# Altium PCB Combination.PcbDoc
Units mil, origin at the board's own origin, x right, y up, seen from the top; angles counter-clockwise.
Board outline 3935 x 3935 mil, 2 copper layers (Top Layer, Bottom Layer); 54 components, 0 nets, 242 pads, 32 vias.
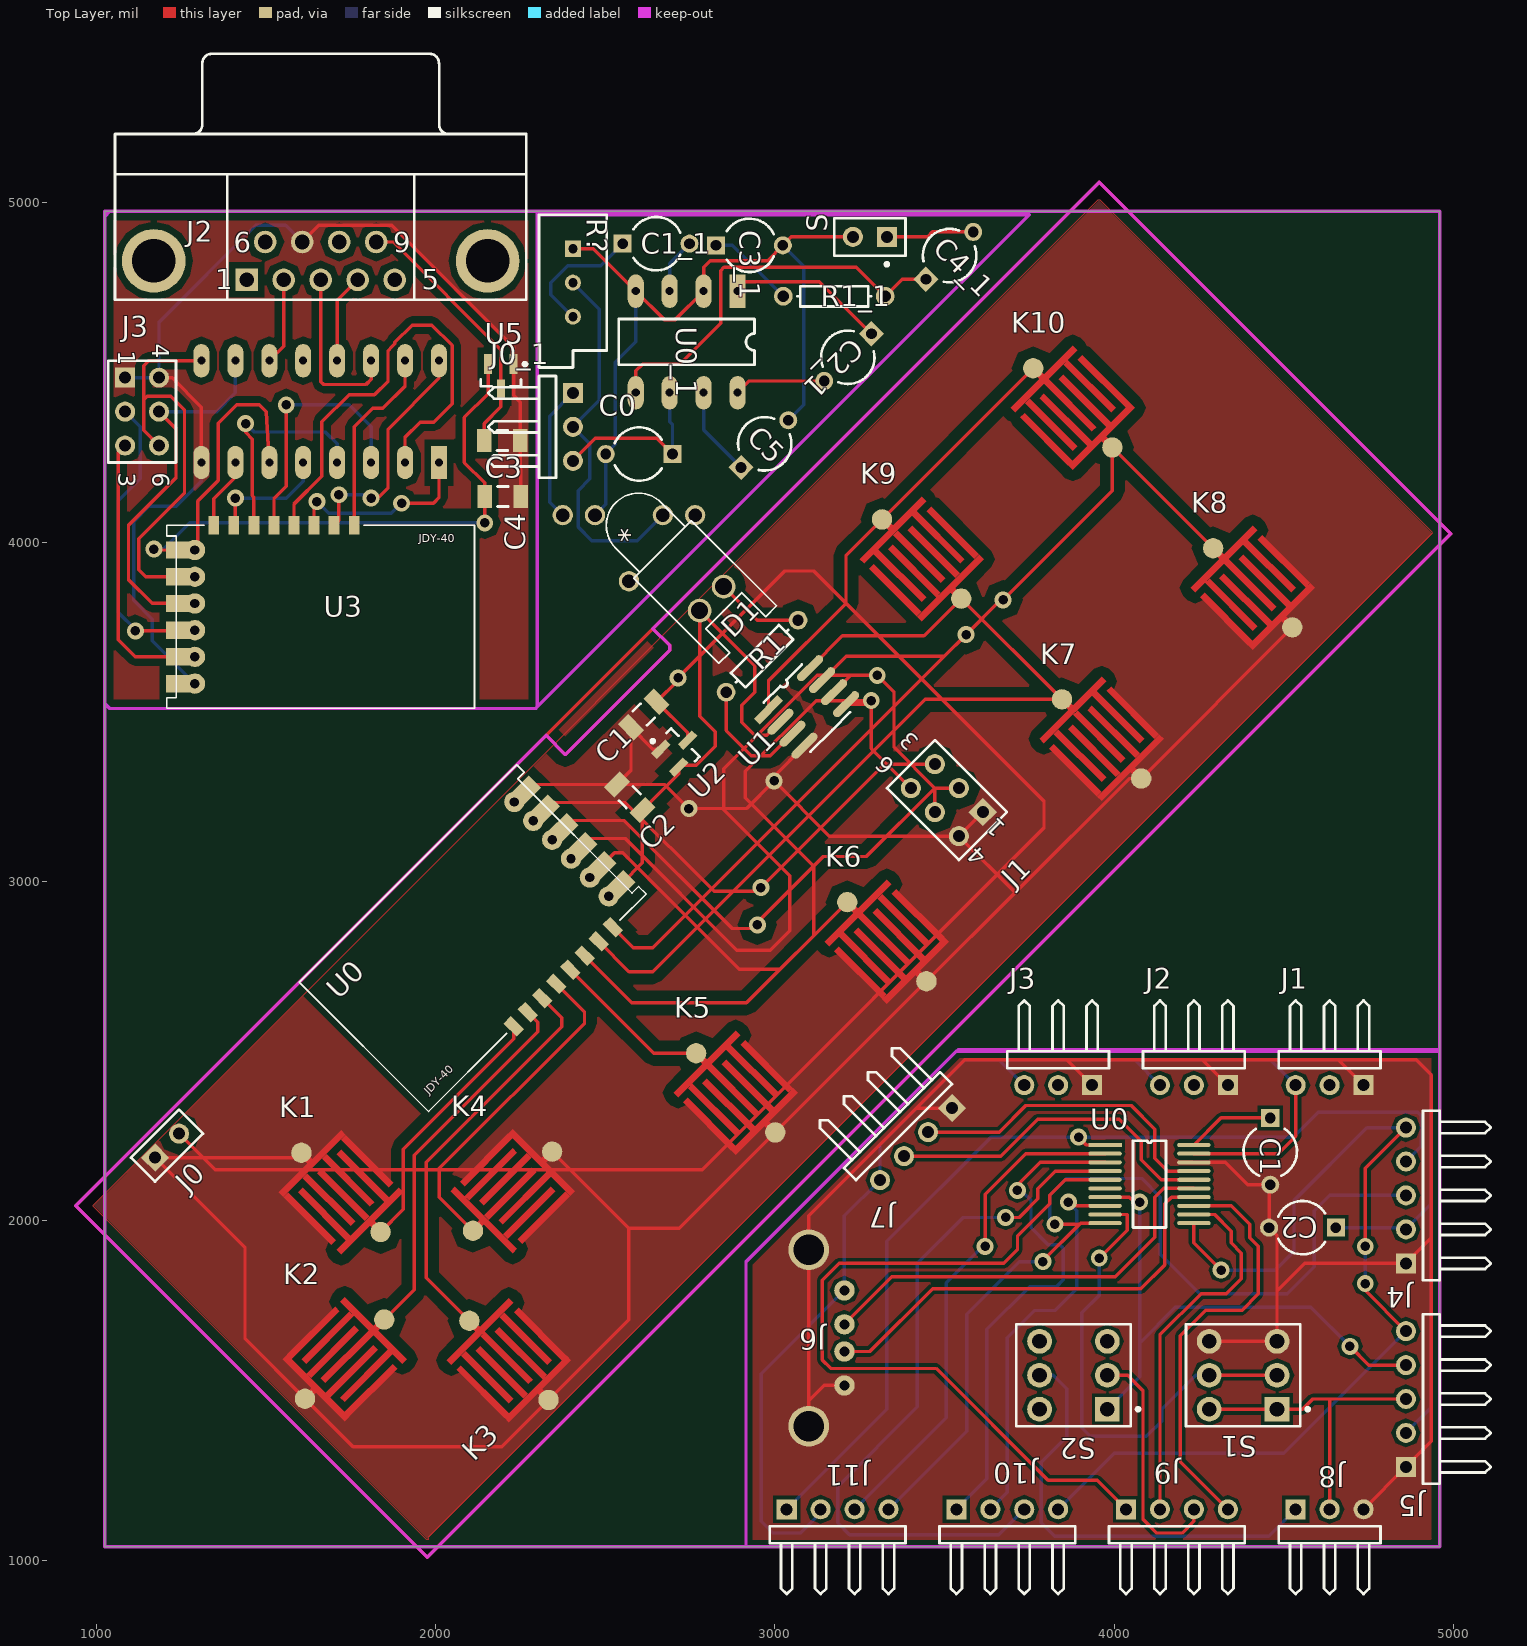
[diagram p0: Top Layer view]
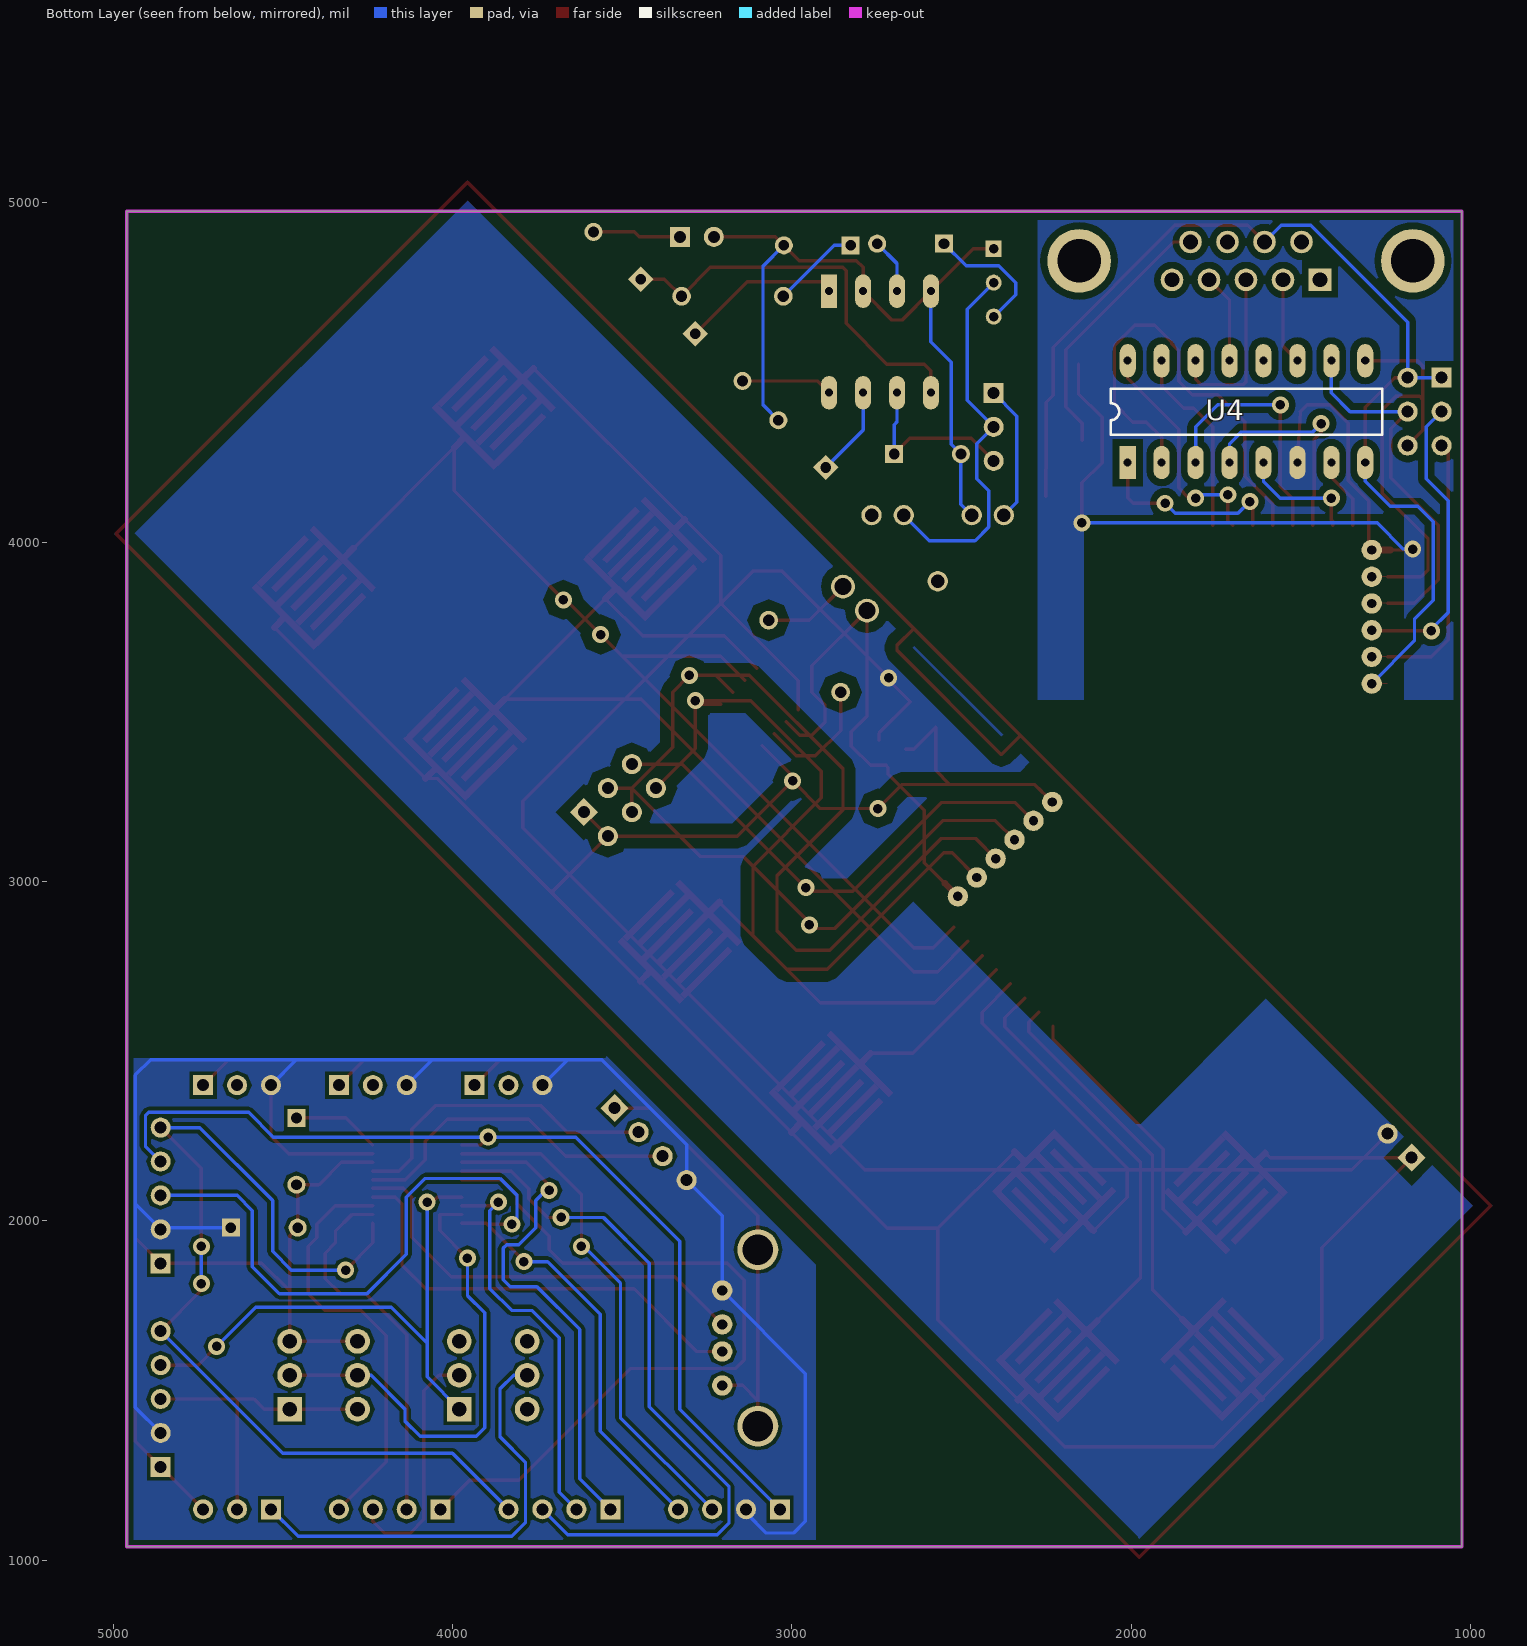
[diagram p1: Bottom Layer view, seen from below]

## Layer stack, top to bottom
Top Solder: solder mask 0.4, Solder Resist, Dk 3.5
Top Layer: signal copper 1.4
Dielectric 1: dielectric 12.6, FR-4, Dk 4.8
Bottom Layer: signal copper 1.4
Bottom Solder: solder mask 0.4, Solder Resist, Dk 3.5

## Board outline
1025,1040 1025,4975 4960,4975 4960,1040

## Design rules (kind name [scope] priority, off if disabled: settings)
Clearance [All] p1: gap=10 ignorepadtopadclearanceinfootprint=FALSE except(0: Arc-Hole Track-Hole SMDPad-Hole THPad-Hole Via-Hole Fill-Hole Poly-Hole Region-Hole Text-Hole)
PolygonConnect [All] p1: connectstyle=Relief reliefconductorwidth=10 reliefentries=4 polygonreliefangle="90 Angle" airgapwidth=10
RoutingVias [All] p1: holewidth=28 width=50 viastyle="Through Hole" minholewidth=28 minwidth=50 maxholewidth=28 maxwidth=50
SolderMaskExpansion [All] p1: expansion=4
Width [All] p1: maxlimit=10 minlimit=10 preferedwidth=10
30 further rules are at their usual default settings.

## Components (designator, comment, footprint, x,y, rotation, side; value= is the part's Value field where it differs from the comment)
* "AudioJack" AudioJack_3.5mm 2570,3885 r90 top
C0 "Cap2" CAPR5-4X5 2600,4260 r180 top value=100uF
C1 "Cap2" CAPR5-4X5 4460,2205 r270 top value=4.7uF
C1 "Cap Semi" C1206 2613.62,3492.34 r45 top value=1uF
C1_1 "Cap2" CAPR5-4X5 2650,4880 r0 top value=1uF (schematic designator C1)
C2 "Cap2" CAPR5-4X5 4555,1980 r180 top value=0.47uF
C2 "Cap Semi" C1206 2572.11,3248.39 r315 top value=1uF
C2_1 "Cap2" CAPR5-4X5 3215,4545 r225 top value=10uF (schematic designator C2)
C3 "Cap Semi" C1206 2196.85,4300 r180 top value=1uF
C3_1 "Cap2" CAPR5-4X5 2925,4875 r0 top value=47uF (schematic designator C3)
C4 "Cap Semi" C1206 2198.15,4135 r180 top value=1uF
C4_1 "Cap2" CAPR5-4X5 3515,4845 r45 top value=220uF (schematic designator C4)
C5 "Cap2" CAPR5-4X5 2970,4290 r45 top value=100uF
D1 "RED LED" LED-0 2813.83,3833.98 r225 top
J0 "POWER" HDR1X2 1173.35,2186.42 r45 top
J0_1 "Header 3H" HDR1X3H 2405,4440 r270 top (schematic designator J0)
J1 "POWER" HDR1X3H 4735,2400 r180 top
J1 "UART" HDR2X3_CEN 3612.86,3204.66 r135 top
J2 "VIDEO" HDR1X3H 4335,2400 r180 top
J2 "DB9" DSUB1.385-2H9 1661.42,5203.11 r0 top
J3 "AUDIO" HDR1X3H 3935,2400 r180 top
J3 "UART" HDR2X3_CEN 1085,4485 r270 top
J4 "Joystick2" HDR1X5H 4860,1875 r90 top
J5 "Joystick1" HDR1X5H 4860,1275 r90 top
J6 "USB_TypeA_Female" USB_TypeA_Female 3205,1795 r270 top
J7 "I2C" HDR1X4H 3522.13,2332.13 r225 top
J8 "EXP" HDR1X3H 4535,1150 r0 top
J9 "EXP" HDR1X4H 4035,1150 r0 top
J10 "EXP" HDR1X4H 3535,1150 r0 top
J11 "EXP" HDR1X4H 3035,1150 r0 top
K1 "UP" GoldFinger 1707.21,1942.47 r45 top
K2 "LEFT" GoldFinger 1873.38,1578.31 r135 top
K3 "DOWN" GoldFinger 2230.47,1730.34 r225 top
K4 "RIGHT" GoldFinger 2085.51,2101.57 r315 top
K5 "SELECT" GoldFinger 2898.69,2518.76 r225 top
K6 "START" GoldFinger 3344.16,2964.24 r225 top
K7 "B" GoldFinger 3977.02,3561.74 r225 top
K8 "A" GoldFinger 4422.5,4007.22 r225 top
K9 "TURBO B" GoldFinger 3446.69,4092.07 r225 top
K10 "TURBO A" GoldFinger 3892.17,4537.55 r225 top
R1 "680" AXIAL-0.3 2962.33,3664.27 r45 top
R1_1 "Res1" AXIAL-0.3 3175,4725 r0 top value=10 (schematic designator R1)
R? "RP" VR5 2405,4765 r270 top value=10K
S "Speaker" PIN2 3330,4900 r180 top
S1 "Download" DPDT-6 4380,1545 r180 top
S2 "Standard/1PExt" DPDT-6 3880,1545 r180 top
U0 "CH559" SSOP20 3973.19,2223.54 r0 top
U0 "JDY-40" JDY-401#1 2230.36,2573.02 r135 top
U0_1 "LM386" DIP8 2890,4740 r270 top (schematic designator U0)
U1 "STC15W204S-SOP8" SOP8 2981.26,3506.43 r45 top
U2 "XC6206" SOT23-3N 2716.68,3390.34 r45 top
U3 "JDY-40" JDY-401#2 1760,4050 r270 top
U4 "STC15W204S-DIP16" DIP16 2010,4235 r90 bottom
U5 "XC6206" SOT23-3N 2192.6,4487.6 r270 top

## Footprints (in the part's own frame and the unit in brackets; to place one, negate y for a bottom-side part, rotate by r counter-clockwise, add the part's x,y. Pads: shape width x height; smd on the part's side, far side on the other; paste and mask are expansions set on the pad)
AudioJack_3.5mm [mil]
  round 60 hole 40: 1(0,0) 2(195,195) 3(195,100) 4(195,-100) 5(195,-195)
AXIAL-0.3 [mm] "Axial Device, Thru-Hole; 2 Leads; 0.3 in Pin Spacing"
  round 1.4 hole 0.85: 1(-3.81,0) 2(3.81,0)
  silkscreen extent -2.77,-0.76 2.77,0.76
C1206 [mm] "Chip Capacitor, Body 3.2x1.6mm, IPC High Density"
  rect 1.1x1.7 smd: 1(-1.35,0) 2(1.35,0)
  silkscreen extent -0.4,-0.75 0.4,0.75, body extent -1.7,-0.9 1.7,0.9, height 1.3
CAPR5-4X5 [mm] "Capacitor; 2 Leads"
  rect 1.35x1.35 hole 0.8: 1(-2.5,0)
  round 1.35 hole 0.8: 2(2.5,0)
  silkscreen extent -1.69,-2 1.82,2
DIP8 [mm]
  rect 2.5x1.2 hole 0.6: 1(0,0)
  oval 2.5x1.2 hole 0.6: 2(0,-2.54) 3(0,-5.08) 4(0,-7.62) 5(7.6,-7.62) 6(7.6,-5.08) 7(7.6,-2.54) 8(7.6,0)
  silkscreen extent 2.08,-8.89 5.52,1.27, body extent -0.12,-9.14 7.75,1.78, height 5.08
DIP16 [mm]
  rect 2.5x1.2 hole 0.6: 1(0,0)
  oval 2.5x1.2 hole 0.6: 2(0,-2.54) 3(0,-5.08) 4(0,-7.62) 5(0,-10.16) 6(0,-12.7) 7(0,-15.24) 8(0,-17.78) 9(7.62,-17.78) 10(7.62,-15.24) 11(7.62,-12.7) 12(7.62,-10.16) 13(7.62,-7.62) 14(7.62,-5.08) 15(7.62,-2.54) 16(7.62,0)
  silkscreen extent 2.08,-19.05 5.54,1.27
DPDT-6 [mm] "Switch; 6 Leads"
  rect 1.85x1.85 hole 1.1: 1(-2.54,2.54)
  round 1.85 hole 1.1: 2(-2.54,0) 3(-2.54,-2.54) 4(2.54,-2.54) 5(2.54,0) 6(2.54,2.54)
  silkscreen extent -4.96,-3.81 4.28,3.81
DSUB1.385-2H9 [mm] "Connector; D Subminiature; 9 Position; Right Angle; Pitch 1.385 mm"
  rect 1.69x1.69 hole 1.09: 1(-5.54,-10.92)
  round 1.69 hole 1.09: 2(-2.77,-10.92) 3(0,-10.92) 4(2.77,-10.92) 5(5.54,-10.92) 6(-4.155,-8.08) 7(-1.385,-8.08) 8(1.385,-8.08) 9(4.155,-8.08)
  round 4.76 hole 3.26: 10(-12.495,-9.5) 11(12.495,-9.5)
  silkscreen extent -15.4,-12.4 15.4,6
GoldFinger [mil]
  round 60 smd: 1(110,255) 2(110,-75)
  Top Layer region: 220,0 240,0 240,200 220,200
  Top Layer region: 180,-20 200,-20 200,180 180,180
  Top Layer region: -20,-40 240,-40 240,-20 -20,-20
  Top Layer region: -20,200 240,200 240,220 -20,220
  Top Layer region: 140,0 160,0 160,200 140,200
  Top Layer region: 100,-20 120,-20 120,180 100,180
  Top Layer region: 60,0 80,0 80,200 60,200
  Top Layer region: 20,-20 40,-20 40,180 20,180
  Top Layer region: -20,0 0,0 0,200 -20,200
  Top Layer lines w20: 110,255 110,210 ; 110,-30 110,-75
HDR1X2 [mm] "Connector; Header; 2 Position"
  rect 1.5x1.5 hole 0.9: 1(0,0)
  round 1.5 hole 0.9: 2(2.54,0)
  silkscreen extent -1.27,-1.27 3.81,1.27
HDR1X3H [mm] "Connector; Header; 3 Position; Right Angle"
  rect 1.5x1.5 hole 0.9: 1(0,0)
  round 1.5 hole 0.9: 2(2.54,0) 3(5.08,0)
  silkscreen extent -1.27,-6.35 6.35,-1.27
HDR1X4H [mm] "Connector; Header; 4 Position; Right Angle"
  rect 1.5x1.5 hole 0.9: 1(0,0)
  round 1.5 hole 0.9: 2(2.54,0) 3(5.08,0) 4(7.62,0)
  silkscreen extent -1.27,-6.35 8.89,-1.27
HDR1X5H [mm] "Connector; Header; 5 Position; Right Angle"
  rect 1.5x1.5 hole 0.9: 1(0,0)
  round 1.5 hole 0.9: 2(2.54,0) 3(5.08,0) 4(7.62,0) 5(10.16,0)
  silkscreen extent -1.27,-6.35 11.43,-1.27
HDR2X3_CEN [mm] "Connector; Header; 3x2 Position"
  rect 1.5x1.5 hole 0.9: 1(0,0)
  round 1.5 hole 0.9: 2(2.54,0) 3(5.08,0) 4(0,2.54) 5(2.54,2.54) 6(5.08,2.54)
  silkscreen extent -1.27,-1.27 6.35,3.81
JDY-401#1 [mm]
  rect 1.4x0.8 smd: 1(0,0) 2(0,-1.5) 3(0,-3) 4(0,-4.5) 5(0,-6) 6(0,-7.5) 7(0,-9) 8(0,-10.5)
  rect 1.3x2 smd: 9(1.85,-13.092) 10(3.85,-13.092) 11(5.85,-13.092) 12(7.85,-13.092) 13(9.85,-13.092) 14(11.85,-13.092)
  round 1.524 hole 0.7: 9(1.85,-11.918) 10(3.85,-11.918) 11(5.85,-11.918) 12(7.85,-11.918) 13(9.85,-11.918) 14(11.85,-11.918)
  Top Layer lines w0.051: 11.85,-11.918 11.85,-13.092 ; 9.85,-11.918 9.85,-13.092 ; 7.85,-11.918 7.85,-13.092 ; 5.85,-11.918 5.85,-13.092 ; 3.85,-11.918 3.85,-13.092 ; 1.85,-11.918 1.85,-13.092
  Top Layer lines w0.17: 7.636,-11.704 7.85,-11.918
  Top Layer lines w0.5: 1.85,-11.694 1.85,-11.918 1.85,-13.092 1.85,-13.319
  silkscreen extent 0,-14.02 13.7,9.01
JDY-401#2 [mm]
  rect 1.4x0.8 smd: 1(0,0) 2(0,-1.5) 3(0,-3) 4(0,-4.5) 5(0,-6) 6(0,-7.5) 7(0,-9) 8(0,-10.5)
  round 1.524 hole 0.7: 9(1.85,-11.918) 10(3.85,-11.918) 11(5.85,-11.918) 12(7.85,-11.918) 13(9.85,-11.918) 14(11.85,-11.918)
  rect 1.3x2 smd: 9(1.85,-13.092) 10(3.85,-13.092) 11(5.85,-13.092) 12(7.85,-13.092) 13(9.85,-13.092) 14(11.85,-13.092)
  Top Layer lines w0.051: 11.85,-13.092 11.85,-11.918 ; 9.85,-13.092 9.85,-11.918 ; 7.85,-13.092 7.85,-11.918 ; 5.85,-13.092 5.85,-11.918 ; 3.85,-13.092 3.85,-11.918 ; 1.85,-13.092 1.85,-11.918 ; 7.85,-11.918 7.85,-11.918
  Top Layer lines w0.17: 7.85,-11.918 7.636,-11.704
  Top Layer lines w0.5: 1.85,-13.319 1.85,-13.092 1.85,-11.918 1.85,-11.694
  silkscreen extent 0,-14.02 13.7,9.01
LED-0 [mil] "LED; 2 Leads"
  round 70 hole 50: 1(50,0) 2(-50,0)
  silkscreen extent -120,-400 120,150
PIN2 [mm] "Photosensitive Diode; 2 Leads"
  rect 1.5x1.5 hole 0.9: 1(0,0)
  round 1.5 hole 0.9: 2(2.54,0)
  silkscreen extent -1.4,-1.4 3.94,2.17
SOP8 [mm]
  rect 2.5x0.635 smd: 1(0,0)
  oval 2.5x0.635 smd: 2(0,-1.27) 3(0,-2.54) 4(0,-3.81) 5(4.4,-3.81) 6(4.4,-2.54) 7(4.4,-1.27) 8(4.4,0)
  silkscreen extent 0,-4.45 4.19,0.64
SOT23-3N [mm] "SOT23, 3-Leads, Body 2.9x1.3mm, Pitch 0.95mm, Lead Span 2.5mm, IPC Medium Density"
  rect 1.5x0.6 smd: 1(-0.95,0.95) 2(-0.95,-0.95) 3(0.95,0)
  silkscreen extent -1.07,-1.5 0.7,1.92, body extent -0.7,-1.5 0.7,1.5, height 1.1
SSOP20 [mm]
  rect 2.5x0.305 smd: 1(0,0)
  oval 2.5x0.305 smd: 2(0,-0.65) 3(0,-1.3) 4(0,-1.95) 5(0,-2.6) 6(0,-3.25) 7(0,-3.9) 8(0,-4.55) 9(0,-5.2) 10(0,-5.85) 11(6.65,-5.85) 12(6.65,-5.2) 13(6.65,-4.55) 14(6.65,-3.9) 15(6.65,-3.25) 16(6.65,-2.6) 17(6.65,-1.95) 18(6.65,-1.3) 19(6.65,-0.65) 20(6.65,0)
  silkscreen extent 2.09,-6.18 4.57,0.33
USB_TypeA_Female [mil]
  round 60 hole 30: 1(0,0) 2(100,0) 3(180,0) 4(280,0)
  round 120 hole 90: 5(-120,-105) 6(400,-105)
VR5 [mm] "Thru-Hole; 3 Leads"
  rect 1.2x1.2 hole 0.7: 1(-2.54,0)
  round 1.2 hole 0.7: 2(0,0) 3(2.54,0)
  silkscreen extent -5.08,-2.54 6.35,2.54

## Part data
*: library part AudioJack_3.5mm
C0 C1 C1_1 C2 C2_1 C3_1 C4_1 C5: "Capacitor", PackageDescription="Capacitor; 2 Leads", PackageReference=CAPR5-4X5, Published=23-Sep-2002, Publisher="Altium Limited"
C1 C2 C3 C4: "Capacitor (Semiconductor SIM Model)", LatestRevisionDate=29-May-2009, LatestRevisionNote="IPC-7351 Footprint Added.", PackageDescription="Chip Capacitor", PackageReference=C1206, Published=8-Jun-2000, Publisher="Altium Limited"
D1: library part LED0, "Typical INFRARED GaAs LED", LatestRevisionDate=08-Jul-2005, LatestRevisionNote="Mech Layer 1 removed.", PackageDescription="LED; 2 Leads", PackageReference=LED-0, Published=8-Jun-2000, Publisher="Altium Limited"
J0: library part "Header 2", "Header, 2-Pin", LatestRevisionDate=17-Jul-2002, LatestRevisionNote="Re-released for DXP Platform.", Publisher="Altium Limited"
J0_1: "Header, 3-Pin, Right Angle", LatestRevisionDate=17-Jul-2002, LatestRevisionNote="Re-released for DXP Platform.", Publisher="Altium Limited"
J1 J2 J3 J8: library part "Header 3H", "Header, 3-Pin, Right Angle", LatestRevisionDate=17-Jul-2002, LatestRevisionNote="Re-released for DXP Platform.", Publisher="Altium Limited"
J1 J3: library part "Header 3X2A", "Header, 3-Pin, Dual row", LatestRevisionDate=17-Jul-2002, LatestRevisionNote="Re-released for DXP Platform.", Publisher="Altium Limited"
J2: library part "D Connector 9", "Receptacle Assembly, 9 Position, Right Angle", PackageDocument=O, DatasheetDocument=1-Sep-1999, Gender=Receptacle, LatestRevisionDate=17-Jul-2002, LatestRevisionNote="Re-released for DXP Platform.", Orientation="Right Angle", PackageReference=788750, Positions=9, Published=15-Jun-2001, Publisher="Altium Limited"
J4 J5: library part "Header 5H", "Header, 5-Pin, Right Angle", LatestRevisionDate=17-Jul-2002, LatestRevisionNote="Re-released for DXP Platform.", Publisher="Altium Limited"
J7 J9 J10 J11: library part "Header 4H", "Header, 4-Pin, Right Angle", LatestRevisionDate=17-Jul-2002, LatestRevisionNote="Re-released for DXP Platform.", Publisher="Altium Limited"
K1 K2 K3 K4 K5 K6 K7 K8 K9 K10: library part GoldFinger
R1: library part Res1, "Resistor", LatestRevisionDate=17-Jul-2002, LatestRevisionNote="Re-released for DXP Platform.", PackageDescription="Axial Device, Thru-Hole; 2 Leads; 0.3 in Pin Spacing", PackageReference=AXIAL-0.3, Published=8-Jun-2000, Publisher="Altium Limited"
R1_1: "Resistor", LatestRevisionDate=17-Jul-2002, LatestRevisionNote="Re-released for DXP Platform.", PackageDescription="Axial Device, Thru-Hole; 2 Leads; 0.3 in Pin Spacing", PackageReference=AXIAL-0.3, Published=8-Jun-2000, Publisher="Altium Limited"
R?: library part RPot, "Potentiometer", LatestRevisionDate=17-Jul-2002, LatestRevisionNote="Re-released for DXP Platform.", PackageDescription="Variable Resistor, Thru-Hole; 3 Leads", PackageReference=VR5, Published=8-Jun-2000, Publisher="Altium Limited", Set Position=0.5, Sim Note="Enter the Resistance value and the set point into parameter fields."
S: "Loudspeaker", LatestRevisionDate=17-Jul-2002, LatestRevisionNote="Re-released for DXP Platform.", PackageReference=PIN2, Published=24-Mar-1999, Publisher="Altium Limited"
S1 S2: library part SW-DPDT, "Double-Pole, Double-Throw Switch", LatestRevisionDate=17-Jul-2002, LatestRevisionNote="Re-released for DXP Platform.", PackageDescription="Switch; 6 Leads", PackageReference=DPDT-6, Published=24-Mar-1999, Publisher="Altium Limited"

## Via types
v1: diameter 50, hole 28, Top Layer to Bottom Layer, 32 vias

## Nets (pads, with @x,y where several pads share a name; then routed paths per layer and width w, separated by ;. In a path a pad name is that pad's centre, name@x,y a point inside that pad or via, vN(x,y) a via of type N, cw(c..) or ccw(c..) an arc to the next point about the centre after c; other vN are vias at no path point)
pads on no net: *.1 *.2 *.3 *.4 *.5 C0.1 C0.2 C1.1 C1.2 C1_1.1 C1_1.2 C2.1 C2.2 C2_1.1 C2_1.2 C3.1 C3.2 C3_1.1 C3_1.2 C4.1 C4.2 C4_1.1 C4_1.2 C5.1 C5.2 D1.1 D1.2 J0.1 J0.2 J0_1.1 J0_1.2 J0_1.3 J1.1 J1.2 J1.3 J1.4 J1.5 J1.6 J2.1 J2.2 J2.3 J2.4 J2.5 J2.6 J2.7 J2.8 J2.9 J2.10 J2.11 J3.1 J3.2 J3.3 J3.4 J3.5 J3.6 J4.1 J4.2 J4.3 J4.4 J4.5 J5.1 J5.2 J5.3 J5.4 J5.5 J6.1 J6.2 J6.3 J6.4 J6.5 J6.6 J7.1 J7.2 J7.3 J7.4 J8.1 J8.2 J8.3 J9.1 J9.2 J9.3 J9.4 J10.1 J10.2 J10.3 J10.4 J11.1 J11.2 J11.3 J11.4 K1.1 K1.2 K2.1 K2.2 K3.1 K3.2 K4.1 K4.2 K5.1 K5.2 K6.1 K6.2 K7.1 K7.2 K8.1 K8.2 K9.1 K9.2 K10.1 K10.2 R1.1 R1.2 R1_1.1 R1_1.2 R?.1 R?.2 R?.3 S1.1 S1.2 S1.3 S1.4 S1.5 S1.6 S2.1 S2.2 S2.3 S2.4 S2.5 S2.6 S.1 S.2 U0.1 U0.2 U0.3 U0.4 U0.5 U0.6 U0.7 U0.8 U0.9 U0.10 U0.11 U0.12 U0.13 U0.14 U0.15 U0.16 U0.17 U0.18 U0.19 U0.20 U0_1.1 U0_1.2 U0_1.3 U0_1.4 U0_1.5 U0_1.6 U0_1.7 U0_1.8 U1.1 U1.2 U1.3 U1.4 U1.5 U1.6 U1.7 U1.8 U2.1 U2.2 U2.3 U3.1 U3.2 U3.3 U3.4 U3.5 U3.6 U3.7 U3.8 U3.9 U3.10 U3.11 U3.12 U3.13 U3.14 U4.1 U4.2 U4.3 U4.4 U4.5 U4.6 U4.7 U4.8 U4.9 U4.10 U4.11 U4.12 U4.13 U4.14 U4.15 U4.16 U5.1 U5.2 U5.3
copper on no net: | length 113854.1
  Top Layer w10: 1085,4285 1065,4265 1065,3712.2 1115,3662.2 1244.58,3662.2 ; v1(1115,3739) 1288.84,3739 1290.79,3740.94 1299.21,3749.37 ; v1(1170,3980) 1184.46,3980 1187.29,3977.17 1235.62,3977.17 ; 1185,4285 1140,4330 1140,4420 ; 1185,4385 1235,4335 1235,4190 1095,4050 1095,3890 1165.31,3819.69 1244.58,3819.69 ; 1185,4485 1223.44,4485 1310,4398.44 1310,4235 ; 1244.06,2257.13 1350.12,2151.07 2785.55,2151.07 3793.18,3158.69 3793.18,3236.47 3114.35,3915.3 3029.5,3915.3 v1@2721.91,3607.71 ; 1244.58,3898.43 1145.57,3898.43 1125,3919 1125,4010 1260,4145 1260,4390 1220,4430 1150,4430 1140,4420 ; 1299.62,3977.17 1299.62,4121.62 1360,4182 1360,4351 1414,4405 1481,4405 1501,4385 1510,4235 ; 1310,4535 1155,4535 1140,4520 1140,4420 ; 1346.61,4050 1346.61,4128.18 1410,4191.57 ; 1405.67,4050 1405.67,4062 1410,4066.33 v1(1410,4130) v1@1410,4131 ; 1410,4191 1410,4191.57 ; 1410,4235 1410,4191.57 ; v1(1440,4350) 1440,4323.72 1460,4303.72 1460,4137.88 1464.72,4133.16 1464.72,4050 ; 1510,4535 1552.36,4577.36 1552.36,4773.19 ; 1523.78,4050 1523.78,4128.78 1560,4165 v1(1560,4405) ; 1582.83,4050 1582.83,4112.83 1665,4195 1665,4355 1745,4435 1820,4435 1860,4475 1860,4565 1871.38,4576.38 1871.38,4576.59 1880,4585.21 1880,4589 1931,4640 1989,4640 2049,4580 2049,4408 1995,4354 1955,4354 1910,4309 1910,4235 ; 1604.68,2200.56 1590.54,2186.42 1173.35,2186.42 1438.51,1921.26 1438.51,1652.56 1615.29,1475.78 1756.71,1334.36 2195.11,1334.36 2333,1472.24 2569.88,1709.12 2569.88,1977.82 ; 1606.89,4885 1655.89,4934 1871,4934 2230,4575 2230,4525 2230,4433 2250,4413 2250,4300 2250,4217.3 2251.3,4216 2251.3,4135 ; 1641.89,4050 1641.89,4111.89 v1(1650,4120) ; 1661.42,4773.19 1661.42,4473.58 1670,4465 1795,4465 1810,4480 1810,4535 ; 1700.94,4050 1715,4064.06 v1(1715,4140) ; 1710,4535 1710,4712.72 1770.47,4773.19 ; 1760,4050 1760,4340 1815,4395 1845,4395 1910,4460 1910,4535 ; v1(1810,4130) 1830,4130 1860,4160 1860,4333 2010,4483 2010,4535 ; 1825,4885 1875,4885 2192.6,4567.4 2192.6,4450.2 2192.6,4398.9 2143.7,4350 2143.7,4300 ; 1838.03,1967.22 1905.2,2034.39 1905.2,2211.17 2230.36,2536.33 2230.36,2573.02 ; 1848.63,1709.12 1937.02,1797.51 1937.02,2193.49 2301.18,2557.65 2301.18,2585.71 2272.12,2614.78 ; v1(1900,4115) 1994,4115 2010,4131 2010,4235 ; 2099.66,1705.59 1972.38,1832.87 1972.38,2172.28 2371.89,2571.79 2371.89,2598.52 2313.88,2656.54 ; 2110.26,1970.75 2011.27,2069.75 2011.27,2154.6 2439.07,2582.4 2439.07,2614.86 2355.63,2698.29 ; v1(2145,4057) 2145,4135 2145,4175 2085,4235 2085,4367.8 2155.2,4438 2155.2,4525 ; 2232.25,3234.69 2283.53,3285.97 ; 2264.92,3267.36 2283.53,3285.97 ; 2287.93,3179.02 2341.85,3232.94 2559.27,3232.94 2820.9,2971.31 2948.18,2971.31 v1(2958.79,2981.92) 3322.95,3346.08 3471.44,3346.08 ; 2325.93,3430.93 2382.5,3374.36 2690.09,3681.95 2690.09,3696.09 2640.59,3745.59 ; 2343.61,2204.1 2569.88,1977.82 ; 2343.61,3123.34 2400.18,3179.91 2555.74,3179.91 2873.94,2861.71 2937.58,2861.71 v1(2948.18,2872.31) 2948.18,2879.39 3142.64,3073.84 3269.92,3073.84 3471.44,3275.37 ; 2397.39,2740.05 2643.43,2494.01 2767.87,2494.01 ; 2399.28,3067.66 2458.5,3126.87 2559.27,3126.87 2888.08,2798.07 2987.07,2798.07 3043.64,2854.64 3043.64,3017.27 2849.19,3211.73 2849.19,3331.93 3124.96,3607.71 v1(3301.74,3607.71) ; 2405,4240 2471,4306 2652.43,4306 2698.43,4260 ; 2405,4865 2465,4865 2590,4740 2675,4655 2705,4655 2790,4740 2790,4810 2810,4830 2978.43,4830 3023.43,4875 3048.43,4900 3230,4900 ; 2439.15,2781.81 2578.46,2642.51 2916.36,2642.51 3213.35,2939.49 ; 2454.96,3011.98 2527.43,3084.45 2552.2,3084.45 2895.15,2741.5 3015.36,2741.5 3114.35,2840.5 3114.35,3045.56 2912.83,3247.08 2912.83,3324.86 3121.42,3533.46 v1(3284.06,3533.46) ; 2480.91,2823.57 2570.05,2734.43 2640.59,2734.43 3443.16,3537 3846.21,3537 3549.22,3833.98 3439.62,3724.38 3199.21,3724.38 3103.75,3628.92 ; 2522.67,2865.33 2582.86,2805.14 2640.59,2805.14 3499.73,3664.27 ; 2543.31,2988.98 2549.65,2995.31 2609.69,3055.36 2609.69,3210.81 2716.68,3317.79 2716.68,3337.45 2721.77,3342.54 2767.87,3342.54 2824.44,3399.11 2824.44,3441.54 2778.48,3487.5 2778.48,3798.62 2941.11,3635.99 2941.11,3558.21 2902.22,3519.32 2902.22,3469.82 2941.11,3430.93 2976.47,3430.93 3016.61,3471.07 ; 2590,4440.79 2590,4505 2610,4525 2720,4525 2840,4645 2840,4800 2850,4810 3240,4810 3325,4725 3375.4,4775.4 3445.4,4775.4 ; 2663.78,3390.34 2640.45,3390.34 2576.03,3454.76 2576.03,3327.48 2534.53,3285.97 2283.53,3285.97 ; v1(2714.84,3600.63) 2714.84,3593.56 2651.2,3529.92 2743.12,3438 2743.12,3416.79 ; 2849.19,3869.34 2948.18,3770.34 3068.39,3770.34 ; 2856.26,3558.21 2856.26,3445.07 2930.51,3370.83 2987.07,3370.83 3051.97,3435.72 ; 2890,4440.79 2924.61,4475.4 3145.4,4475.4 ; 2890,4740 2890,4768 3131.19,4768 3284.6,4614.6 ; 2981.26,3506.43 2981.26,3591.28 3209.81,3819.84 3209.81,3961.26 3315.88,4067.33 3761.36,4512.8 ; 3087.32,3400.36 2997.68,3310.72 v1(2997.68,3296.58) ; 3100,1395 3100,1470 ; 3139.1,3593.56 3209.81,3664.27 3499.73,3664.27 ; 3174.46,3558.21 3223.95,3607.71 v1(3301.74,3607.71) ; 3205,1515 3145,1515 3100,1470 ; 3205,1615 3280,1615 3465,1800 4079,1800 4149,1870 4149,2050 4169,2070 4235,2070 ; 3205,1695 3345,1835 4003.77,1835 4120,1951.23 4120,2070 4145.59,2095.59 4235,2095.59 ; 3209.81,3522.85 3273.45,3522.85 v1(3284.06,3533.46) ; 3330,4900 3450,4900 3464.6,4914.6 3584.6,4914.6 ; 3380.71,2190.71 3665.71,2190.71 3775,2300 4015,2300 4080,2235 4080,2180 4138.82,2121.18 4235,2121.18 ; 3400.73,3275.37 3284.06,3392.04 v1(3284.06,3533.46) ; 3451.42,2261.42 3661.42,2261.42 3740,2340 4050,2340 4120,2270 4120,2185 4158.23,2146.77 4235,2146.77 ; 3471.44,3204.66 3471.44,3275.37 ; 3522.13,2332.13 3417.13,2332.13 ; 3542.15,3275.37 3471.44,3275.37 ; 3612.86,3204.66 3542.15,3133.94 ; v1(3620,1925) 3620,2078 3739.95,2197.95 3973.19,2197.95 ; v1(3680,2010) 3720,2010 3775,2065 3775,2095 3826.77,2146.77 3973.19,2146.77 ; v1(3715,2090) 3715,2105 3782.36,2172.36 3973.19,2172.36 ; v1(3790,1880) 3790,1882.23 3897.77,1990 ; v1(3825,1990) 3897.77,1990 ; v1(3865,2055) 3875.59,2044.41 3973.19,2044.41 ; v1(3895,2247) 3918.46,2223.54 3973.19,2223.54 ; 3935,2400 3860,2475 ; v1(3956,1890) 4038,1972 4038,2018.82 3973.19,2018.82 ; 3973.19,1993.23 3901,1993.23 3897.77,1990 ; 3973.19,2070 4045,2070 4060,2055 v1(4075,2055) ; 3973.19,2121.18 3856.18,2121.18 3810,2075 3810,2050 3715,1955 3715,1915 3675,1875 3190,1875 3140,1825 3140,1590 3165,1565 3475,1565 3805,1235 3950,1235 4035,1150 ; 3980,1545 4040,1545 4085,1500 4085,1120 4125,1080 4200,1080 4235,1115 4235,1150 ; 4135,1150 4135,1664 4256,1785 4330,1785 4375,1830 4375,1905 4345,1935 4345,1970 4296.18,2018.82 4235,2018.82 ; 4235,1993.23 4235,1935 v1(4315,1855) ; 4235,2044.41 4345.59,2044.41 4400,1990 4400,1950 4425,1925 4425,1785 4377.03,1737.03 4270,1737.03 4195,1662.03 4195,1290 4335,1150 ; 4235,2172.36 4327.64,2172.36 4393.43,2106.57 4460,2106.57 4456.57,2103.15 4456.57,1980 4480,1956.57 4480,1793.43 ; 4235,2197.95 4482.95,2197.95 4535,2250 4535,2400 ; 4235,2223.54 4314.88,2303.43 4460,2303.43 ; 4280,1445 4480,1445 4555,1445 4585,1475 4635,1475 ; 4280,1545 4480,1545 ; 4280,1645 4480,1645 4480,1793.43 ; 4291.69,3982.47 3994.7,4279.46 3994.7,4152.18 v1(3672.97,3830.44) 3665.9,3830.44 v1(3563.37,3727.91) 3499.73,3664.27 ; 4335,2400 4260,2475 ; 4525.03,3749.13 4079.55,3303.65 4044.2,3303.65 3708.32,2967.77 ; 4635,1150 4635,1475 ; v1(4695,1630) 4750,1575 4860,1575 ; 4735,1150 4860,1275 4935,1350 4935,1950 ; 4735,2400 4660,2475 ; v1(4740,1815) 4740,1795 4860,1675 ; v1(4740,1925) 4740,2155 4860,2275 ; 4860,1475 4635,1475 ; 2283.53,3285.97 2675.95,3285.97 v1(2746.66,3215.26) 2916.36,3215.26 v1(2997.68,3296.58) ; 2569.88,1977.82 2718.37,1977.82 3001.22,2260.67 3446.69,2706.14 3708.32,2967.77 ; v1(2997.68,3296.58) 3160.32,3133.94 3542.15,3133.94 ; 3100,1470 3100,1915 3100,2015 3417.13,2332.13 ; v1(3301.74,3607.71) 3351.23,3558.21 3351.23,3395.57 3471.44,3275.37 ; 3417.13,2332.13 3560,2475 3860,2475 ; 3542.15,3133.94 3708.32,2967.77 ; 3860,2475 4260,2475 ; 4260,2475 4660,2475 ; v1(4315,1855) 4326.77,1855 4320.89,1849.11 v1(4315,1855) ; 4480,1793.43 4561.57,1875 4860,1875 4935,1950 ; 4660,2475 4890,2475 4935,2430 4935,1950 ; 940,2045 3955.81,5060.81 4991.72,4024.9 1975.91,1009.09 940,2045
  Bottom Layer w10: 1085,4385 1130,4340 1130,4187 1065,4122 1065,3793 1115,3743 v1(1115,3739) ; 1085,4485 1185,4485 1185,4649 1470,4934 1557.89,4934 1606.89,4885 ; v1(1170,3980) 1198,3980 1275,4057 v1(2145,4057) ; 1185,4385 1355,4385 1410,4440 1410,4535 ; 1290.79,3583.46 1165,3709.25 1165,3773.7 1110,3828.7 1110,4061 1155,4106 1236,4106 1310,4180 1310,4235 ; v1(1410,4130) 1560,4130 1610,4180 1610,4235 ; v1(1440,4350) 1465,4325 1675,4325 1710,4290 1710,4235 ; v1(1560,4405) 1745,4405 1810,4340 1810,4235 ; v1(1650,4120) 1685,4085 1870,4085 v1(1900,4115) ; v1(1715,4140) 1800,4140 v1(1810,4130) ; 2375,4080 2337,4118 2337,4372 2405,4440 ; 2405,4665 2340,4730 2340,4765 2390,4815 2486.57,4815 2551.57,4880 ; 2405,4765 2483,4687 2483,4418 2405,4340 2455,4290 2455,4187 2420,4152 2420,4045 2460,4005 2595,4005 2670,4080 ; 2470,4080 2501.57,4111.57 2501.57,4260 2530,4288.43 2530,4531 2590,4591 2590,4740 ; 2690,4440.79 2690,4355 2698.43,4346.57 2698.43,4260 ; 2690,4740 2690,4821.57 2748.43,4880 ; 2790,4440.79 2790,4330.8 2900.4,4220.4 ; 2826.57,4875 2875,4875 3025,4725 ; 3023.43,4875 3085,4813.43 3085,4405 3039.6,4359.6 ; 3035,1150 3330,1445 3330,1940 3637,2247 v1(3895,2247) 4528,2247 4601,2320 4895,2320 4905,2310 4905,2220 4860,2175 ; 3135,1150 3135,1140 3075,1080 2995,1080 2960,1115 2960,1550 3205,1795 3205,2015 3310,2120 3310,2225 3560,2475 3660,2475 ; 3235,1150 3505,1420 3505,1817 3620,1932 v1(3620,1925) ; 3335,1150 3565,1380 3565,1725 3720,1880 v1(3790,1880) ; 3535,1150 3625,1240 3625,1680 3750.97,1805.97 3830,1805.97 3850,1825.97 3850,1920 3840,1930 3805,1930 3755,1980 3755,2060 v1@3725,2090 ; 3635,1150 3685,1200 3685,1655 3766,1736 3826,1736 3890,1800 3890,2030 v1(3865,2055) ; v1(3680,2010) 3555,2010 3420,1875 3420,1452 3185,1217 3185,1110 3220,1075 3660,1075 3735,1150 ; v1(3715,2090) v1@3725,2090 ; v1@3725,2101.36 v1@3725,2090 ; 3735,2400 3660,2475 ; 3780,1545 3820,1545 3860,1505 3860,1364 3785,1289 3785,1110 3825,1070 4455,1070 4535,1150 ; v1(3825,1990) 3810,2005 3810,2075 3860,2125 4081,2125 4136,2070 4136,1901 4252,1785 4510,1785 4590,1865 4590,2030 4635,2075 4860,2075 ; 3835,1150 4000,1315 4500,1315 4860,1675 ; v1(3956,1890) 3956,1780 3905,1729 3905,1390 3930,1365 4095,1365 4140,1410 4140,1445 4240,1545 4280,1545 ; 3980,1445 4075,1540 4075,1640 ; v1(4075,2055) 4075,1640 ; 4135,2400 4060,2475 ; v1(4315,1855) 4475,1855 4530,1910 4530,2060 4745,2275 4860,2275 ; 4535,2400 4460,2475 ; 4653.43,1980 4855,1980 4860,1975 4935,2050 ; v1(4695,1630) 4580,1745 4180,1745 4075,1640 ; v1(4740,1815) v1(4740,1925) ; 4860,1375 4935,1450 4935,2050 ; 3660,2475 4060,2475 ; 4060,2475 4460,2475 ; 4460,2475 4890,2475 4935,2430 4935,2050

## Polygon pours and split planes (outlines as drawn)
no net on Top Layer "NONET_L01_P014" (solid, pour order 14): 4940,1060 4935,1065 4935,2480 3545,2480 2935,1870 2935,1060
no net on Top Layer "NONET_L01_P004" (solid, pour order 4): 1040,4960 1040,3525 2285,3525 2285,4965
no net on Top Layer "NONET_L01_P002" (solid, pour order 2): 989.5,2045 1972.38,1062.12 1979.45,1062.12 1979.45,1069.19 4938.69,4028.43 3959.35,5007.78 3952.27,5007.78
no net on Top Layer "NONET_L01_P000" (solid, pour order 0): 964.75,2048.54 971.82,2048.54 1979.45,1040.91 4966.97,4028.43 3955.81,5039.6
no net on Bottom Layer "NONET_L02_P012" (solid, pour order 12): 4940,1060 4940,2480 3550,2480 3545,2485 2930,1870 2930,1060
no net on Bottom Layer "NONET_L02_P006" (solid, pour order 6): 1040,4955 1040,3525 2280,3525 2285,3530 2285,4965

## Keep-outs
Top Layer:
  lines w10: 3540,2505 4960,2505 ; 4960,1040 4960,2500 3535,2500 2915,1880 ; 2300,3515 2300,4965 3750,4965 2300,3515 ; 2300,3515 2295,3510 1040,3510 1025,3525 1025,4960 1040,4975 2295,4975 2300,4970 2300,3515 ; 2915,1880 2915,1040 2915,1880 ; 940,2045 2325.93,3430.93 2382.5,3374.36 2690.09,3681.95 2690.09,3696.09 2640.59,3745.59 3955.81,5060.81 4991.72,4024.9 1975.91,1009.09 940,2045
Keep-Out Layer:
  lines w10: 2915,1040 4960,1040 ; 4960,1040 1025,1040 1025,4975 4960,4975 4960,1040

## Other copper
Top Layer:
  pour cut-out: 1185,4100 2130,4100 2130,3510 1185,3510
  pour cut-out: 1576.4,2681.4 1972.38,2285.42 1986.52,2285.42 2675.95,2974.85 2279.97,3370.83 2265.83,3370.83
  pour cut-out: 1583.47,2688.47 1975.91,2296.02 2654.73,2974.85 2262.29,3367.29
Bottom Layer:
  pour cut-out: 1195,4085 1195,3515 1190,3510 2140,3510 2140,4075 2135,4080

## Text inside footprints (layer, text, board x,y; h text height)
J1: Top Overlay "6" at 3358.31,3346.08 h50 r135; Top Overlay "3" at 3429.02,3416.79 h50 r135; Top Overlay "1" at 3683.57,3162.23 h50 r135; Top Overlay "4" at 3627.01,3077.38 h50 r135
J2: Top Overlay "1" at 1350,4745 h59.06; Top Overlay "5" at 1960,4745 h59.06; Top Overlay "9" at 1875,4855 h59.06; Top Overlay "6" at 1405,4855 h59.06
J3: Top Overlay "6" at 1165,4205 h50 r270; Top Overlay "3" at 1065,4205 h50 r270; Top Overlay "1" at 1065,4565 h50 r270; Top Overlay "4" at 1165,4585 h50 r270